# EAGLE board slimsata-3 (EAGLE 6.4)
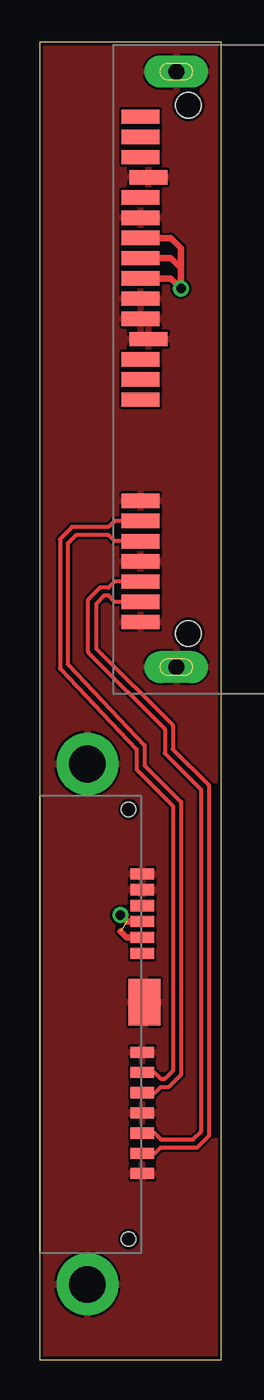
[diagram p0: board, top side]
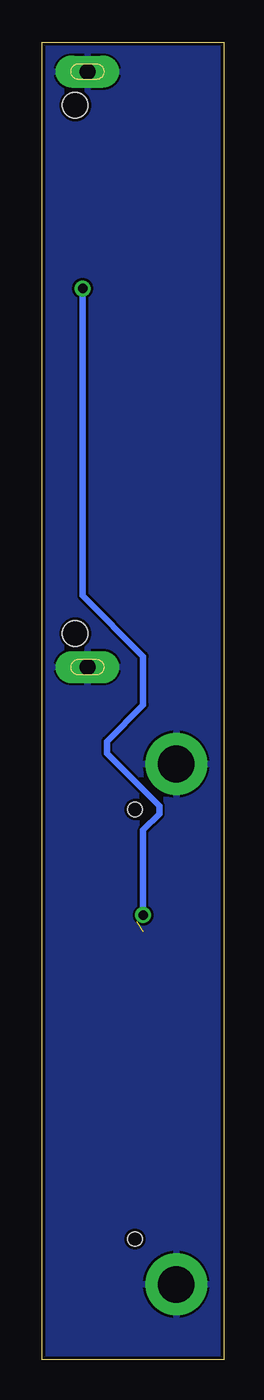
[diagram p1: board, bottom side, seen from below]

Size 11.43 x 82.79 mm. Coordinates in mm from the lower left corner, seen from the top.
Outline: 0,0 11.43,0 11.43,82.79 0,82.79 0,0
Copper layers (1*16): Top 0.035mm / dielectric 1.5mm / Bottom 0.035mm
Design rules "platinensammler_02_mod": minimum track width 0.15mm, minimum drill 0.3mm, track to track 0.15mm, track to pad 0.15mm, pad to pad 0.15mm, via to via 0.15mm, smd to smd 0mil, copper to edge 0.2mm, drill to drill 0.2mm, minimum pad ring 0.2mm, minimum via ring 0.2mm, stop-mask expansion 4mil, vias tented up to drill 0.8mm, thermal gap 0.15mm

## Footprints (pad centres in the part's own frame; a part is rotated, then mirrored left to right if it is on the bottom)
MOLEX_47018 = drill 1 pad 2 long: MECH1 -18.71,2.84; MECH2 18.71,2.84 | smd 0.9 x 2.4: P1 -1.905,5.08; P2 -0.635,5.08; P3 0.635,5.08; P4 1.905,4.58; P5 3.175,5.08; P6 4.445,5.08; P7 5.715,5.08; P8 6.985,5.08; P9 8.255,5.08; P10 9.525,5.08; P11 10.795,5.08; P12 12.065,4.58; P13 13.335,5.08; P14 14.605,5.08; P15 15.875,5.08; S1 -15.875,5.08; S2 -14.605,5.08; S3 -13.335,5.08; S4 -12.065,5.08; S5 -10.795,5.08; S6 -9.525,5.08; S7 -8.255,5.08 | hole 1.6: -16.595,2.08; 16.595,2.08
MOLEX_47300-1005 = drill 2.3 pad 3.9: MECH1 -16.35,3; MECH2 16.35,3 | smd 2.93 x 2: MECH3 -1.38,6.6 | smd 0.7 x 1.5: P1 -4.45,6.45; P2 -5.45,6.45; P3 -6.45,6.45; P4 -7.45,6.45; P5 -8.45,6.45; P6 -9.45,6.45; S1 9.38,6.45; S2 8.11,6.45; S3 6.84,6.45; S4 5.57,6.45; S5 4.3,6.45; S6 3.03,6.45; S7 1.76,6.45 | hole 0.9: -13.5,5.6; 13.5,5.6

## Placement (x,y rotation side)
CON1  [MOLEX_47018]  11.43,62.23 90 top
CON2  [MOLEX_47300-1005]  0,21.08 270 top

## Library data of the parts
CON1 CON2 = sata

## Nets
GND: CON1.MECH1 CON1.MECH2 CON1.P4 CON1.P5 CON1.P6 CON1.P10 CON1.P12 CON1.S1 CON1.S4 CON1.S7 CON2.MECH1 CON2.MECH2 CON2.MECH3 CON2.P5 CON2.P6 CON2.S1 CON2.S4 CON2.S7
N$3: CON1.P7 CON1.P8 CON1.P9 CON2.P2 CON2.P3
N$5: CON1.S2 CON2.S2
N$6: CON1.S3 CON2.S3
N$7: CON1.S5 CON2.S5
N$8: CON1.S6 CON2.S6

## Tracks (layer width: path | path; a pad name or v marks a point on that pad's centre or on a via)
GND
  pour Top: 0.25,82.55 11.18,82.55 11.18,0.25 0.25,0.25
  pour Bottom: 0.25,82.55 11.18,82.55 11.18,0.25 0.25,0.25
N$3  (via drill 0.6)  (1 unrouted)
  Top 0.406: CON2.P2 5.47,26.53 5.08,26.92 | CON2.P3 5.49,27.53 v5.08,27.94 | CON1.P9 8.26,70.48 8.89,69.85 8.89,68.58 | CON1.P8 8.26,69.22 8.89,68.58 | CON1.P7 8.26,67.94 v8.89,67.31 8.89,68.33 8.89,68.58
  Bottom 0.406: v5.08,27.94 5.08,33.27 4.06,34.29 4.06,34.8 7.37,38.1 7.37,38.86 5.08,41.15 5.08,44.2 8.89,48.01 v8.89,67.31
N$5
  Top 0.254: CON2.S2 7.26,12.97 7.62,13.34 9.91,13.34 10.67,14.1 10.67,36.07 8.38,38.35 8.38,39.88 3.56,44.7 3.56,47.5 4.06,48.01 4.32,48.01 4.7,47.62 CON1.S2
N$6
  Top 0.254: CON2.S3 7.22,14.24 7.62,13.84 9.65,13.84 10.16,14.35 10.16,35.81 7.87,38.1 7.87,39.62 3.05,44.45 3.05,47.75 3.81,48.51 4.32,48.51 4.7,48.9 CON1.S3
N$7
  Top 0.254: CON2.S5 7.26,16.78 7.62,17.14 8.13,17.14 8.89,17.91 8.89,35.05 6.6,37.34 6.6,38.61 1.78,43.69 1.78,51.31 2.29,51.82 4.32,51.82 4.7,51.44 CON1.S5
N$8
  Top 0.254: CON2.S6 7.22,18.05 7.62,17.65 7.87,17.65 8.38,18.16 8.38,34.8 6.1,37.08 6.1,38.35 1.27,43.43 1.27,51.56 2.03,52.32 4.32,52.32 4.7,52.7 CON1.S6